# Altium PCB NAPaC_DevKitC-DetachableModule.PcbDoc
Units mm, origin at the board's own origin, x right, y up, seen from the top; angles counter-clockwise.
Board outline 45 x 60 mm, 2 copper layers (Top Layer, Bottom Layer); 22 components, 13 nets, 59 pads, 0 vias.
Unrouted connection lines stored in the file: 21.
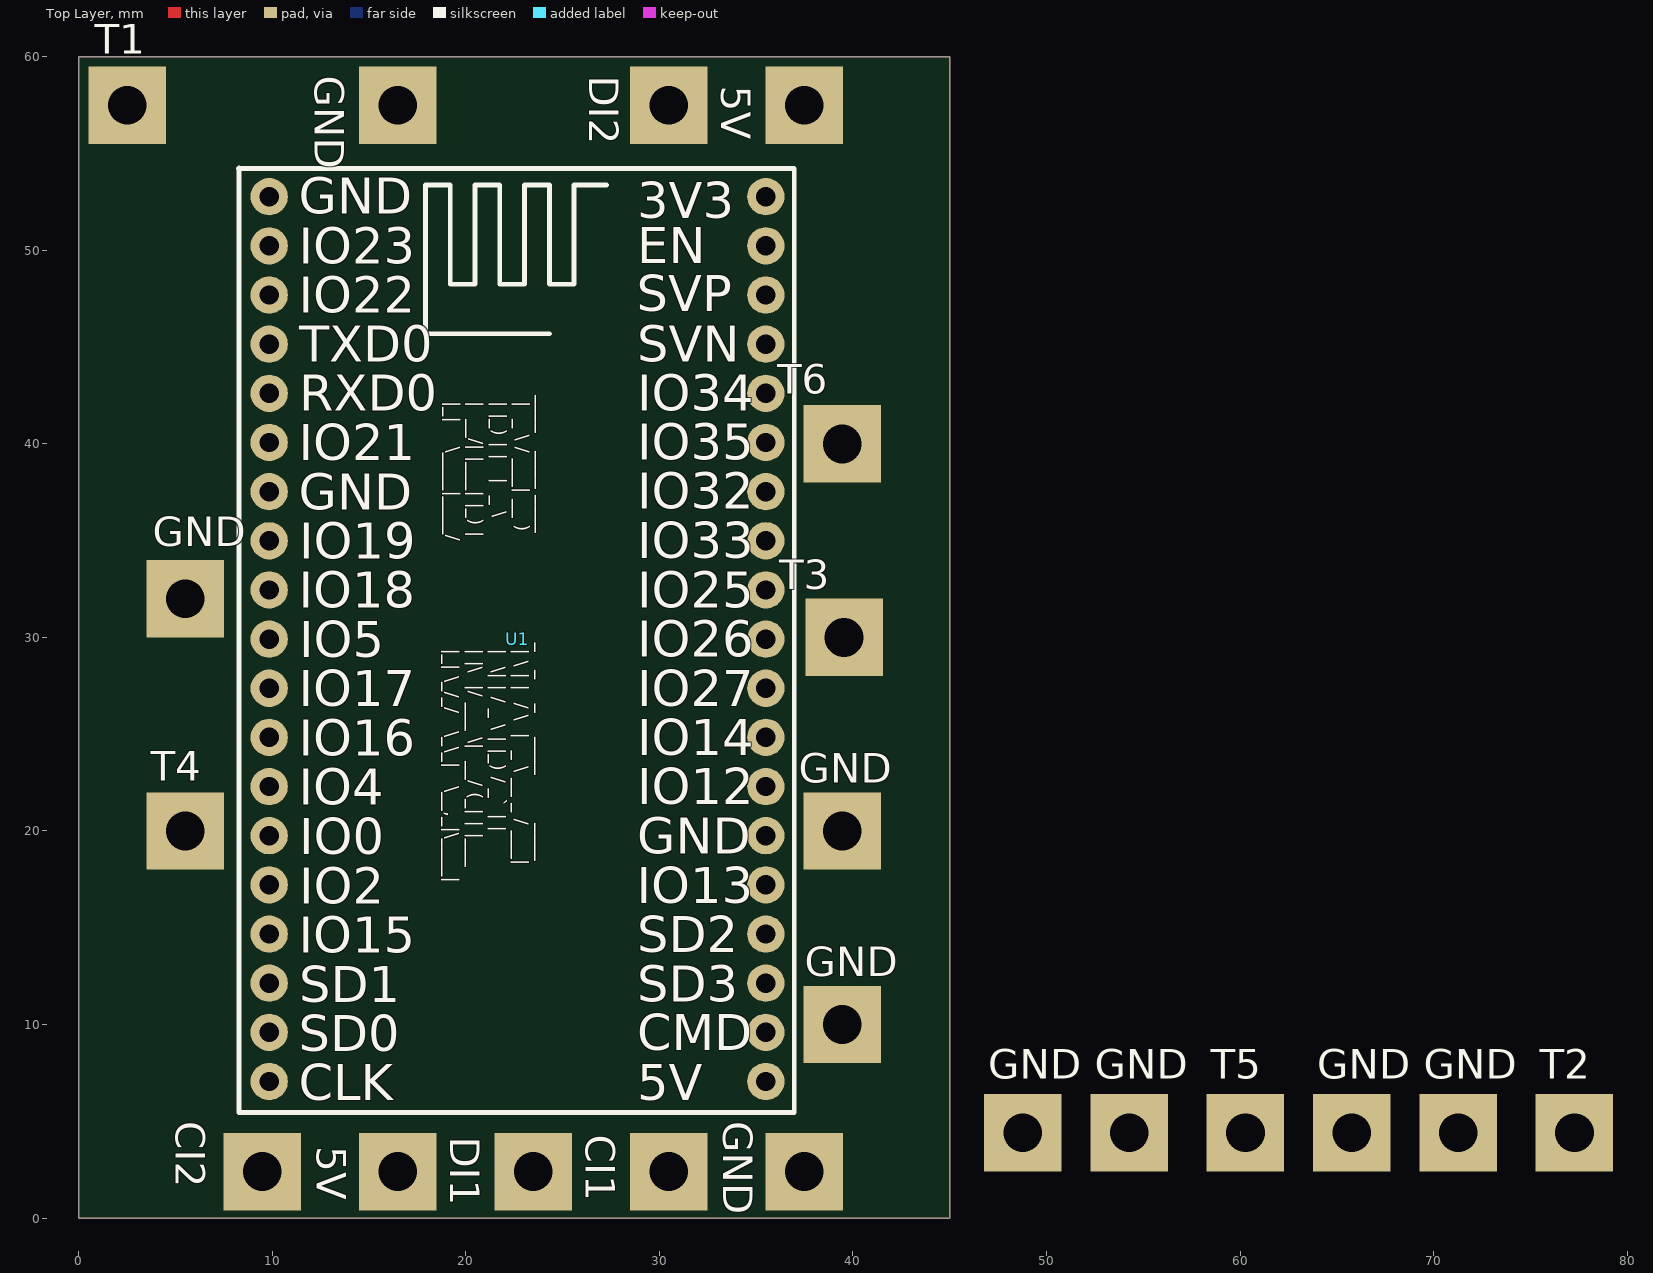
[diagram p0: Top Layer view]
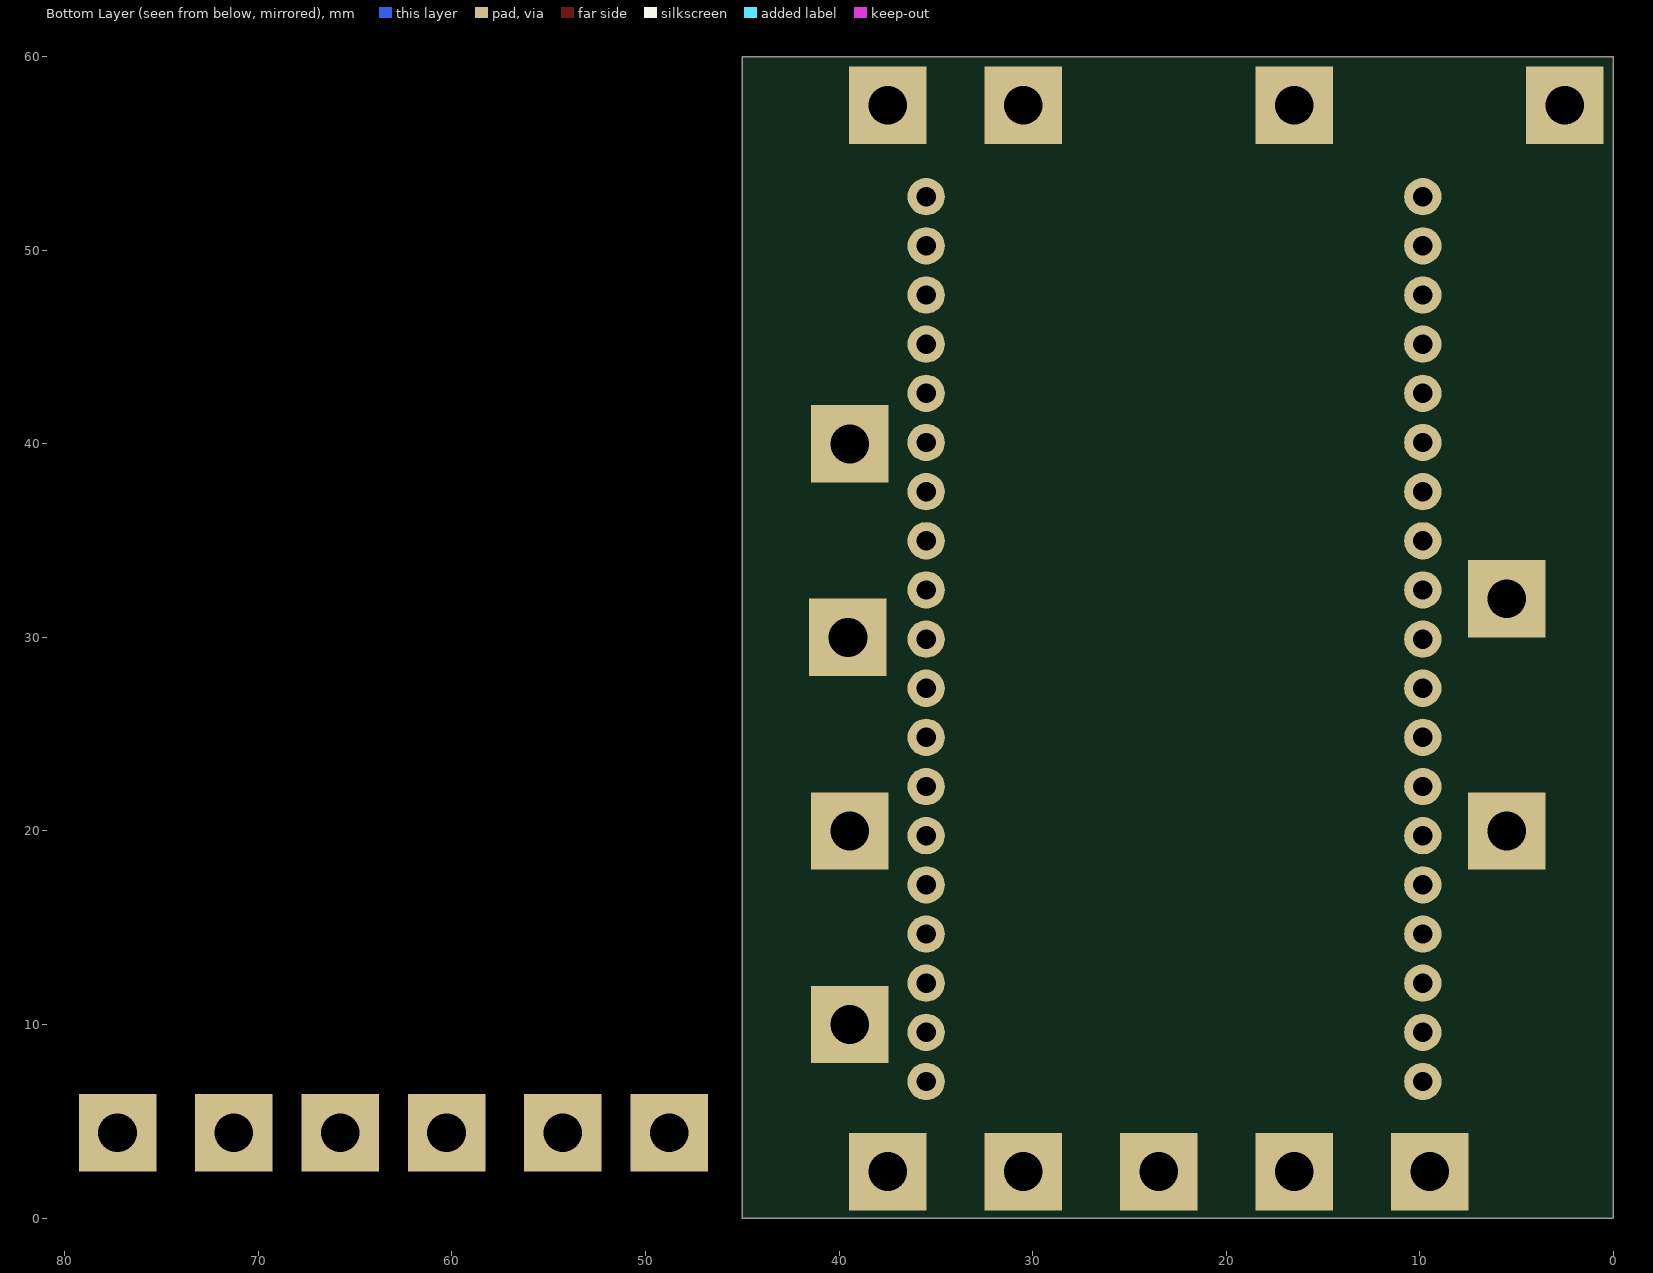
[diagram p1: Bottom Layer view, seen from below]

## Layer stack, top to bottom
Top Solder: solder mask 0.0102, Solder Resist, Dk 3.5
Top Layer: signal copper 0.0356
Dielectric 1: dielectric 0.32, FR-4, Dk 4.8
Bottom Layer: signal copper 0.0356
Bottom Solder: solder mask 0.0102, Solder Resist, Dk 3.5

## Board outline
0,0 0,60 45,60 45,0
cut-out: -11.119,64.3

## Design rules (kind name [scope] priority, off if disabled: settings)
BoardOutlineClearance [All] p1: gap=0.3 ignorepadtopadclearanceinfootprint=FALSE
Clearance Clearance_1 [All] p1: gap=0.15 ignorepadtopadclearanceinfootprint=TRUE
HoleSize [All] p1: absolutevalues=TRUE maxlimit=2.54 minlimit=0.3 maxpercent=80.000 minpercent=20.000
HoleToHoleClearance [All] p1: gap=0.5 allowstackedmicrovias=TRUE
MinimumSolderMaskSliver [All] p1: minsoldermaskwidth=0.1
PlaneConnect [All] p1: planeconnectstyle=Relief reliefexpansion=0.3 reliefentries=4 reliefconductorwidth=0.2 reliefairgap=0.2
PolygonConnect [All] p1: connectstyle=Relief reliefconductorwidth=0.254 reliefentries=4 polygonreliefangle="90 Angle" airgapwidth=0.254
RoutingVias [All] p1: holewidth=0.5 width=1.2 viastyle="Through Hole" minholewidth=0.3 minwidth=1 maxholewidth=1.5 maxwidth=2.5
SilkToSilkClearance [All] p1: silktosilkclearance=0.15
SilkToSolderMaskClearance [IsPad] p1: minsilkscreentomaskgap=0.15 clearancetoexposedcopper=TRUE
SolderMaskExpansion [All] p1: expansion=0.05
UnRoutedNet [All] p1: checkbadconnections=TRUE
Width [All] p1: maxlimit=2 minlimit=0.15 preferedwidth=0.2
23 further rules are at their usual default settings.

## Classes and differential pairs
component class NAPaC_DevKitC-DetachableModule: 5V CI1 DI1 DI2 GND T1 T2 T3 T4 T5 T6 U1

## Components (designator, comment, footprint, x,y, rotation, side; value= is the part's Value field where it differs from the comment)
5V "Plug" PLUG 37.481,57.5 r180 top
5V "Plug" PLUG 16.481,2.4 r0 top
CI1 "Plug" PLUG 30.481,2.4 r0 top
CI2 "Plug" PLUG 9.481,2.4 r0 top
DI1 "Plug" PLUG 23.481,2.4 r0 top
DI2 "Plug" PLUG 30.48,57.5 r180 top
GND "Plug" PLUG 65.781,4.4 r0 top
GND "Plug" PLUG 54.281,4.4 r0 top
GND "Plug" PLUG 48.781,4.4 r0 top
GND "Plug" PLUG 71.281,4.4 r0 top
GND "Plug" PLUG 39.441,10 r90 top
GND "Plug" PLUG 39.441,20 r90 top
GND "Plug" PLUG 5.5,32 r270 top
GND "Plug" PLUG 37.481,2.4 r0 top
GND "Plug" PLUG 16.481,57.5 r180 top
T1 "Plug" PLUG 2.5,57.5 r270 top
T2 "Plug" PLUG 77.281,4.4 r0 top
T3 "Plug" PLUG 39.541,30 r90 top
T4 "Plug" PLUG 5.5,20 r270 top
T5 "Plug" PLUG 60.281,4.4 r0 top
T6 "Plug" PLUG 39.441,40 r90 top
U1 "ESP32DEVKITC" ESP32DEVKITC 8.269,54.261 r270 top

## Footprints (in the part's own frame and the unit in brackets; to place one, negate y for a bottom-side part, rotate by r counter-clockwise, add the part's x,y. Pads: shape width x height; smd on the part's side, far side on the other; paste and mask are expansions set on the pad)
ESP32DEVKITC [mil]
  round 76 hole 39.37: 1(58.54,1071.97) 2(158.54,1071.97) 3(258.54,1071.97) 4(358.54,1071.97) 5(458.54,1071.97) 6(558.54,1071.97) 7(658.54,1071.97) 8(758.54,1071.97) 9(858.54,1071.97) 10(958.54,1071.97) 11(1058.54,1071.97) 12(1158.54,1071.97) 13(1258.54,1071.97) 14(1358.54,1071.97) 15(1458.54,1071.97) 16(1558.54,1071.97) 17(1658.54,1071.97) 18(1758.54,1071.97) 19(1858.54,1071.97) 20(1858.54,61.73) 21(1758.54,61.73) 22(1658.54,61.73) 23(1558.54,61.73) 24(1458.54,61.73) 25(1358.54,61.73) 26(1258.54,61.73) 27(1158.54,61.73) 28(1058.54,61.73) 29(958.54,61.73) 30(858.54,61.73) 31(758.54,61.73) 32(658.54,61.73) 33(558.54,61.73) 34(458.54,61.73) 35(358.54,61.73) 36(258.54,61.73) 37(158.54,61.73) 38(58.54,61.73)
  silkscreen extent 0,-1 1922,1130
PLUG [mm]
  rect 4x4 hole 2: 1(0,0)

## Part data
U1: "Dev Board Kit", Package=None, Availability=Unavailable, MF="Espressif Systems", MP=ESP32-DEVKITC, Price="16.97 USD", SnapEDA_Link=https://www.snapeda.com/parts/ESP32-DEVKITC/Espressif%20Systems/view-part/?ref=snap
5V 5V CI1 CI2 DI1 DI2 GND GND GND GND GND GND GND GND GND T1 T2 T3 T4 T5 T6: LatestRevisionDate=17-Jul-2002, LatestRevisionNote="Re-released for DXP Platform.", Publisher="Altium Limited"

## Nets (pads, with @x,y where several pads share a name; then routed paths per layer and width w, separated by ;. In a path a pad name is that pad's centre, name@x,y a point inside that pad or via, vN(x,y) a via of type N, cw(c..) or ccw(c..) an arc to the next point about the centre after c; other vN are vias at no path point)
5V: 5V.1 U1.19
GND: GND.1 U1.14 U1.32 U1.38
IO2: T2.1 U1.24
IO4: T1.1 U1.26
IO12: T5.1 U1.13
IO13: T4.1 U1.15
IO14: T6.1 U1.12
IO15: T3.1 U1.23
IO21: U1.33
IO22: DI1.1 U1.36
IO23: CI1.1 U1.37
IO25: DI2.1 U1.9
IO26: CI2.1 U1.10
pads on no net: U1.1 U1.2 U1.3 U1.4 U1.5 U1.6 U1.7 U1.8 U1.11 U1.16 U1.17 U1.18 U1.20 U1.21 U1.22 U1.25 U1.27 U1.28 U1.29 U1.30 U1.31 U1.34 U1.35

## Polygon pours and split planes (outlines as drawn)
no net on Mechanical 1 (solid, shelved): 52.5,-3.5
GND on Top Layer "Top Layer-GND" (solid, shelved, pour order 0): 0,0 0,60 45,60 45,0

## Silkscreen, mask and mechanical layers (free items; w line width, h text height)
Mechanical 1:
  region: 1.057,59.5

## Dimensions
9.481,57.5 to 9.481,2.4 on Mechanical 1
45,0 to 0,0 on Mechanical 1
9.481,2.4 to 16.481,2.4 on Mechanical 1
16.481,2.4 to 23.481,2.4 on Mechanical 1
23.481,2.4 to 30.481,2.4 on Mechanical 1
37.481,2.4 to 30.481,2.4 on Mechanical 1
9.481,57.5 to 16.481,57.5 on Mechanical 1
23.481,57.5 to 16.481,57.5 on Mechanical 1
30.48,57.5 to 23.481,57.5 on Mechanical 1
37.481,57.5 to 30.48,57.5 on Mechanical 1
37.481,57.5 to 30.48,57.5 on Mechanical 1
30.48,57.5 to 23.481,57.5 on Mechanical 1
16.481,57.5 to 23.481,57.5 on Mechanical 1
9.481,57.5 to 16.481,57.5 on Mechanical 1
9.837,52.774 to 0,60 on Mechanical 1
35.497,52.774 to 45,60 on Mechanical 1
9.837,7.054 to 35.497,7.054 on Mechanical 1
2.581,30 to 2.581,20 on Mechanical 1
2.581,40 to 2.581,30 on Mechanical 1
42.441,40 to 45,60 on Mechanical 1
0,60 to 0,0 on Mechanical 1
42.541,30 to 42.441,40 on Mechanical 1
42.441,20 to 42.541,30 on Mechanical 1
42.441,10 to 42.441,20 on Mechanical 1

## Text inside footprints (layer, text, board x,y; h text height)
U1: Top Overlay "CLK" at 11.372,6.085 h1.88; Top Overlay "SD0" at 11.376,8.616 h1.88; Top Overlay "SD1" at 11.379,11.153 h1.88; Top Overlay "IO15" at 11.374,13.712 h1.88; Top Overlay "IO2" at 11.379,16.246 h1.88; Top Overlay "IO0" at 11.378,18.793 h1.88; Top Overlay "IO4" at 11.369,21.351 h1.88; Top Overlay "IO16" at 11.374,23.889 h1.88; Top Overlay "IO17" at 11.374,26.434 h1.88; Top Overlay "IO5" at 11.38,28.978 h1.88; Top Overlay "IO18" at 11.372,31.523 h1.88; Top Overlay "IO19" at 11.38,34.072 h1.88; Top Overlay "GND" at 11.366,36.604 h1.88; Top Overlay "IO21" at 11.371,39.153 h1.88; Top Overlay "RXD0" at 11.381,41.716 h1.88; Top Overlay "TXD0" at 11.378,44.255 h1.88; Top Overlay "IO22" at 11.367,46.773 h1.88; Top Overlay "IO23" at 11.367,49.316 h1.88; Top Overlay "GND" at 11.374,51.882 h1.88; Top Overlay "5V" at 28.848,6.087 h1.88; Top Overlay "CMD" at 28.862,8.665 h1.88; Top Overlay "SD3" at 28.852,11.186 h1.88; Top Overlay "SD2" at 28.856,13.738 h1.88; Top Overlay "IO13" at 28.837,16.255 h1.88; Top Overlay "GND" at 28.863,18.834 h1.88; Top Overlay "IO12" at 28.856,21.368 h1.88; Top Overlay "IO14" at 28.851,23.909 h1.88; Top Overlay "IO27" at 28.851,26.454 h1.88; Top Overlay "IO26" at 28.856,28.999 h1.88; Top Overlay "IO25" at 28.846,31.545 h1.88; Top Overlay "IO33" at 28.852,34.088 h1.88; Top Overlay "IO32" at 28.844,36.638 h1.88; Top Overlay "IO35" at 28.843,39.186 h1.88; Top Overlay "IO34" at 28.859,41.713 h1.88; Top Overlay "SVN" at 28.864,44.248 h1.88; Top Overlay "SVP" at 28.835,46.842 h1.88; Top Overlay "EN" at 28.86,49.338 h1.88; Top Overlay "3V3" at 28.845,51.661 h1.88; Top Overlay "____   ____ ____   /  |  _ \ / ___| __ )  /  | |_) | |   |  _ \  /  |  __/| |___| |_) | /  |_|    \____|____/" at 18.768,42.523 h1.2 r270; Top Overlay "_   _    _    ____        ____  /  | \ | |  / \  |  _ \ __ _ / ___| /  |  \| | / _ \ | |_) / _` | |     /  | |\  |/ ___ \|  __/ (_| | |___  /  |_| \_/_/   \_\_|   \__,_|\____|" at 18.73,29.719 h1.2 r270